# Altium PCB PCBPolyESP.PcbDoc (part 2 of 2)
Units mm, origin at the board's own origin, x right, y up, seen from the top; angles counter-clockwise.
Board outline 111.66 x 80.65 mm, 2 copper layers (Top Layer, Bottom Layer); 61 components, 47 nets, 234 pads, 117 vias.
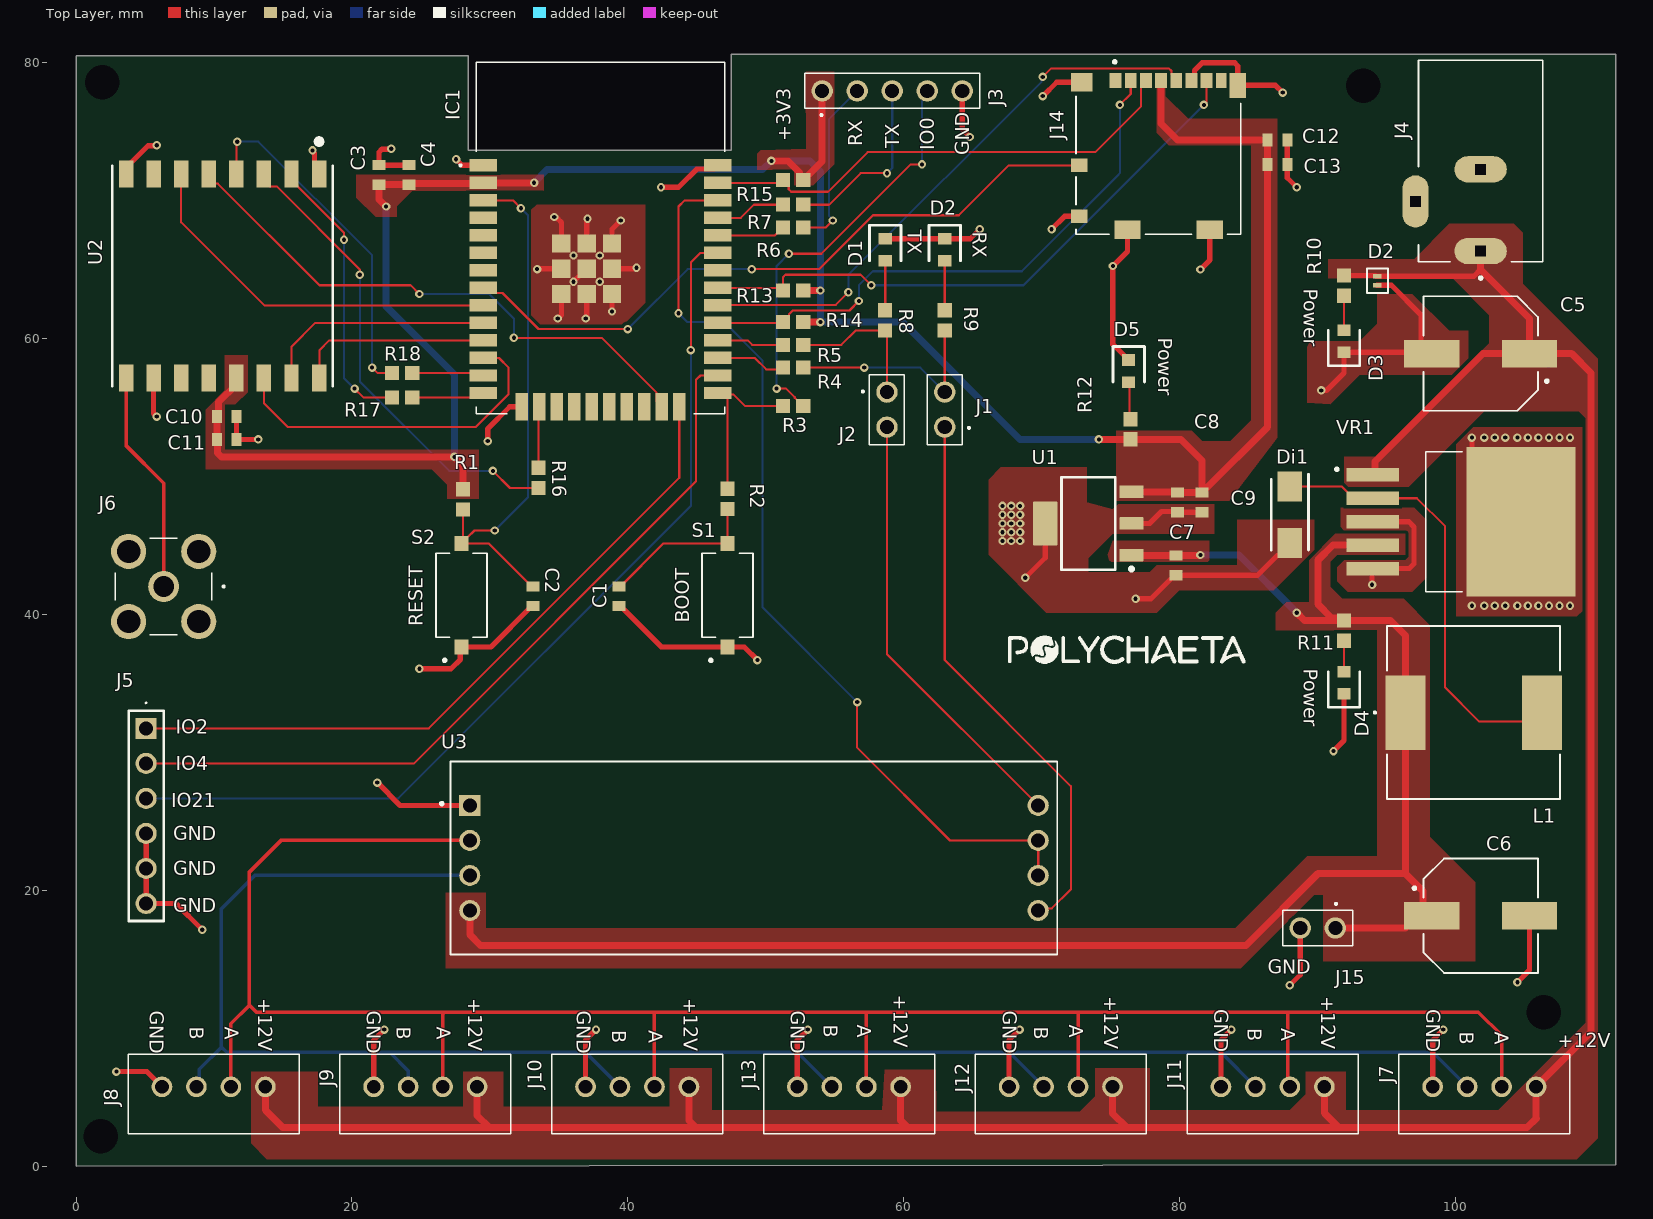
[diagram p0: Top Layer view]

## Silkscreen, mask and mechanical layers (free items; w line width, h text height) (continued)
Top Overlay: (continued)
  text "GND" at 51.816,11.26 h1.02 r270
  text "GND" at 67.183,11.26 h1.02 r270
  text "B" at 54.229,10.245 h1.02 r270
  text "A" at 56.642,10.245 h1.02 r270
  text "A" at 72.009,10.245 h1.02 r270
  text "B" at 8.255,10.118 h1.02 r270
  text "A" at 10.795,10.118 h1.02 r270
  text "B" at 23.241,10.118 h1.02 r270
  text "A" at 26.162,10.118 h1.02 r270
  text "B" at 69.469,10.118 h1.02 r270
  text "B" at 84.963,9.991 h1.02 r270
  text "A" at 87.376,9.991 h1.02 r270
  text "B" at 38.862,9.864 h1.02 r270
  text "A" at 41.529,9.864 h1.02 r270
  text "B" at 100.33,9.737 h1.02 r270
  text "A" at 102.87,9.737 h1.02 r270
  text "+12V" at 107.443,8.636 h1.02
Bottom Overlay:
  text "(C) 2025 Tunisia Baits" at 67.391,42.418 h1.02
  text "PLOYCHAETA PCB" at 63.201,39.37 h1.02
  text "Mohamed Aziz Lassoued & Abdelghafour Ayachi" at 78.902,36.237 h1.02
Board Shape:
  lines w0.508: 0,0 0.127,80.391 28.321,80.391 28.448,73.66 47.498,73.66 47.498,80.518 111.633,80.645 111.76,0.127 0,0